# Altium PCB L4Duino_ver1.PcbDoc
Units mm, origin at the board's own origin, x right, y up, seen from the top; angles counter-clockwise.
Board outline 68.58 x 53.34 mm, 4 copper layers (Top Layer, Int1 (GND), Int2 (PWR), Bottom Layer), stack 1.369 mm thick; 6 components, 0 nets, 47 pads, 2 vias.
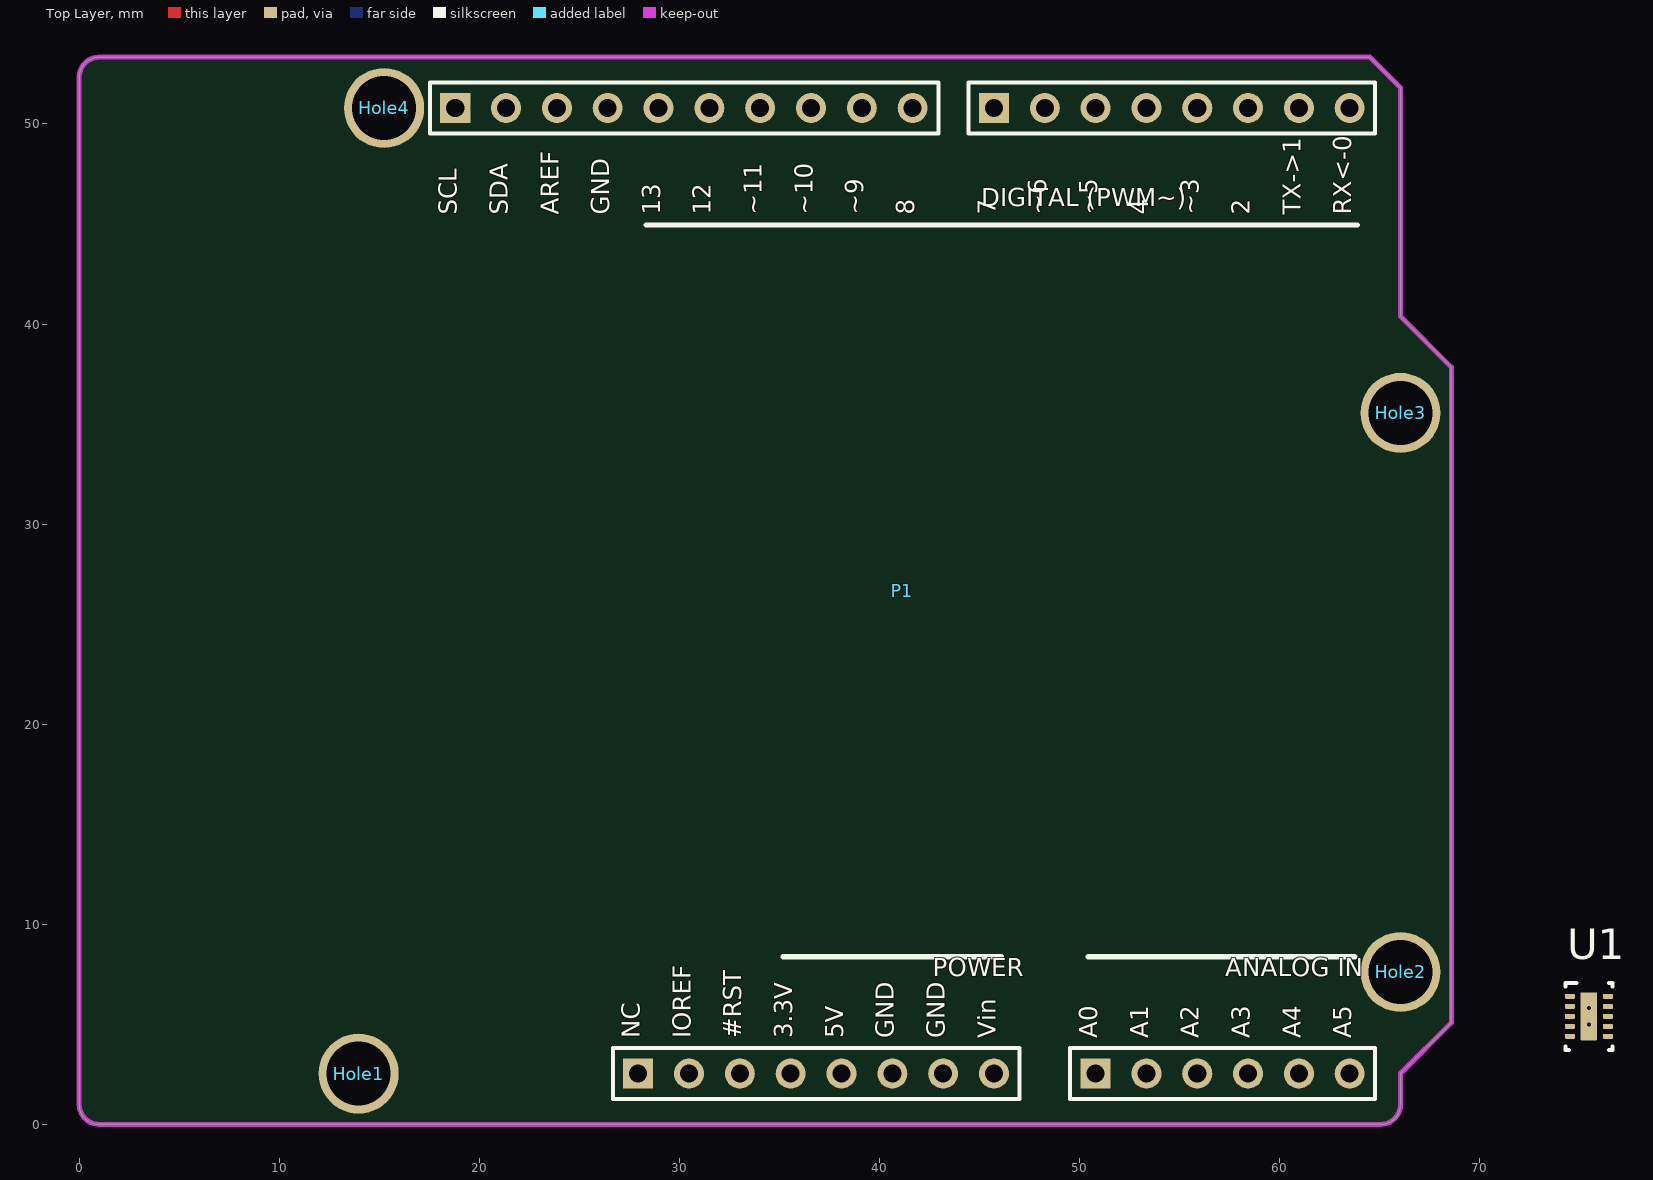
[diagram p0: Top Layer view]
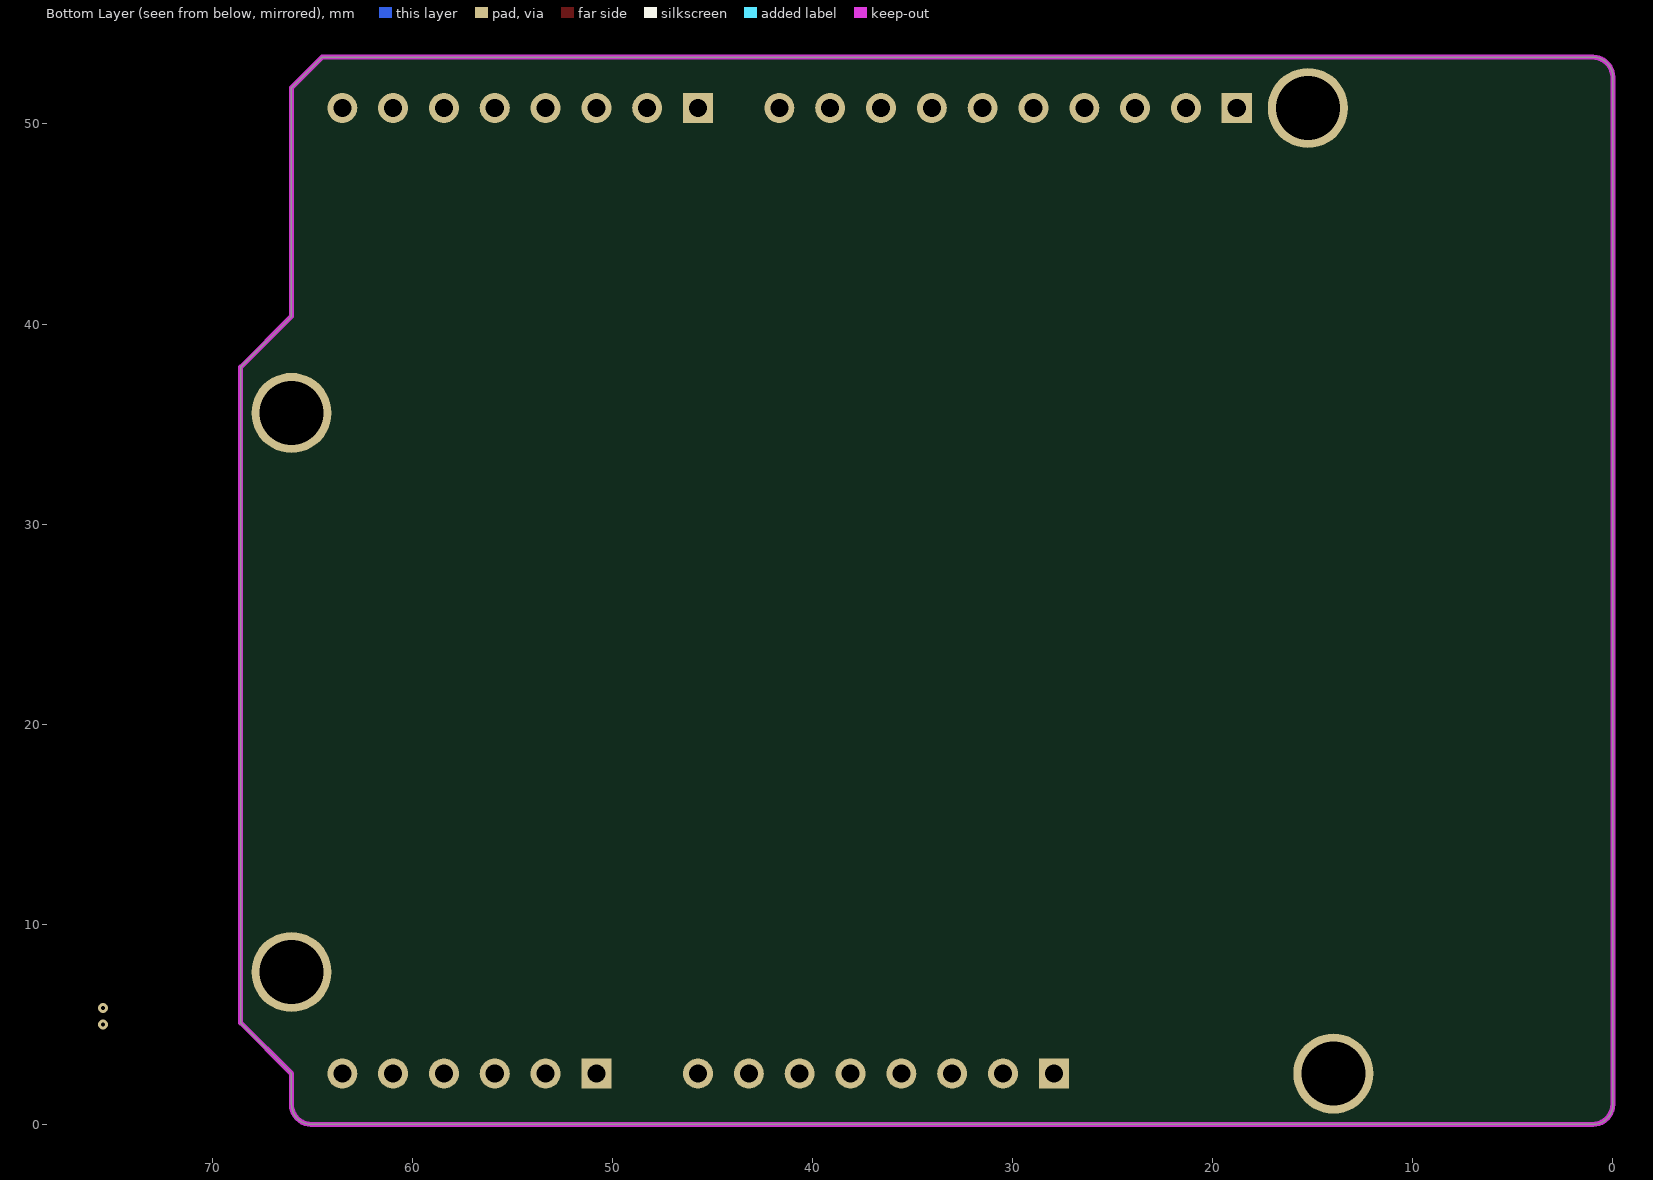
[diagram p1: Bottom Layer view, seen from below]
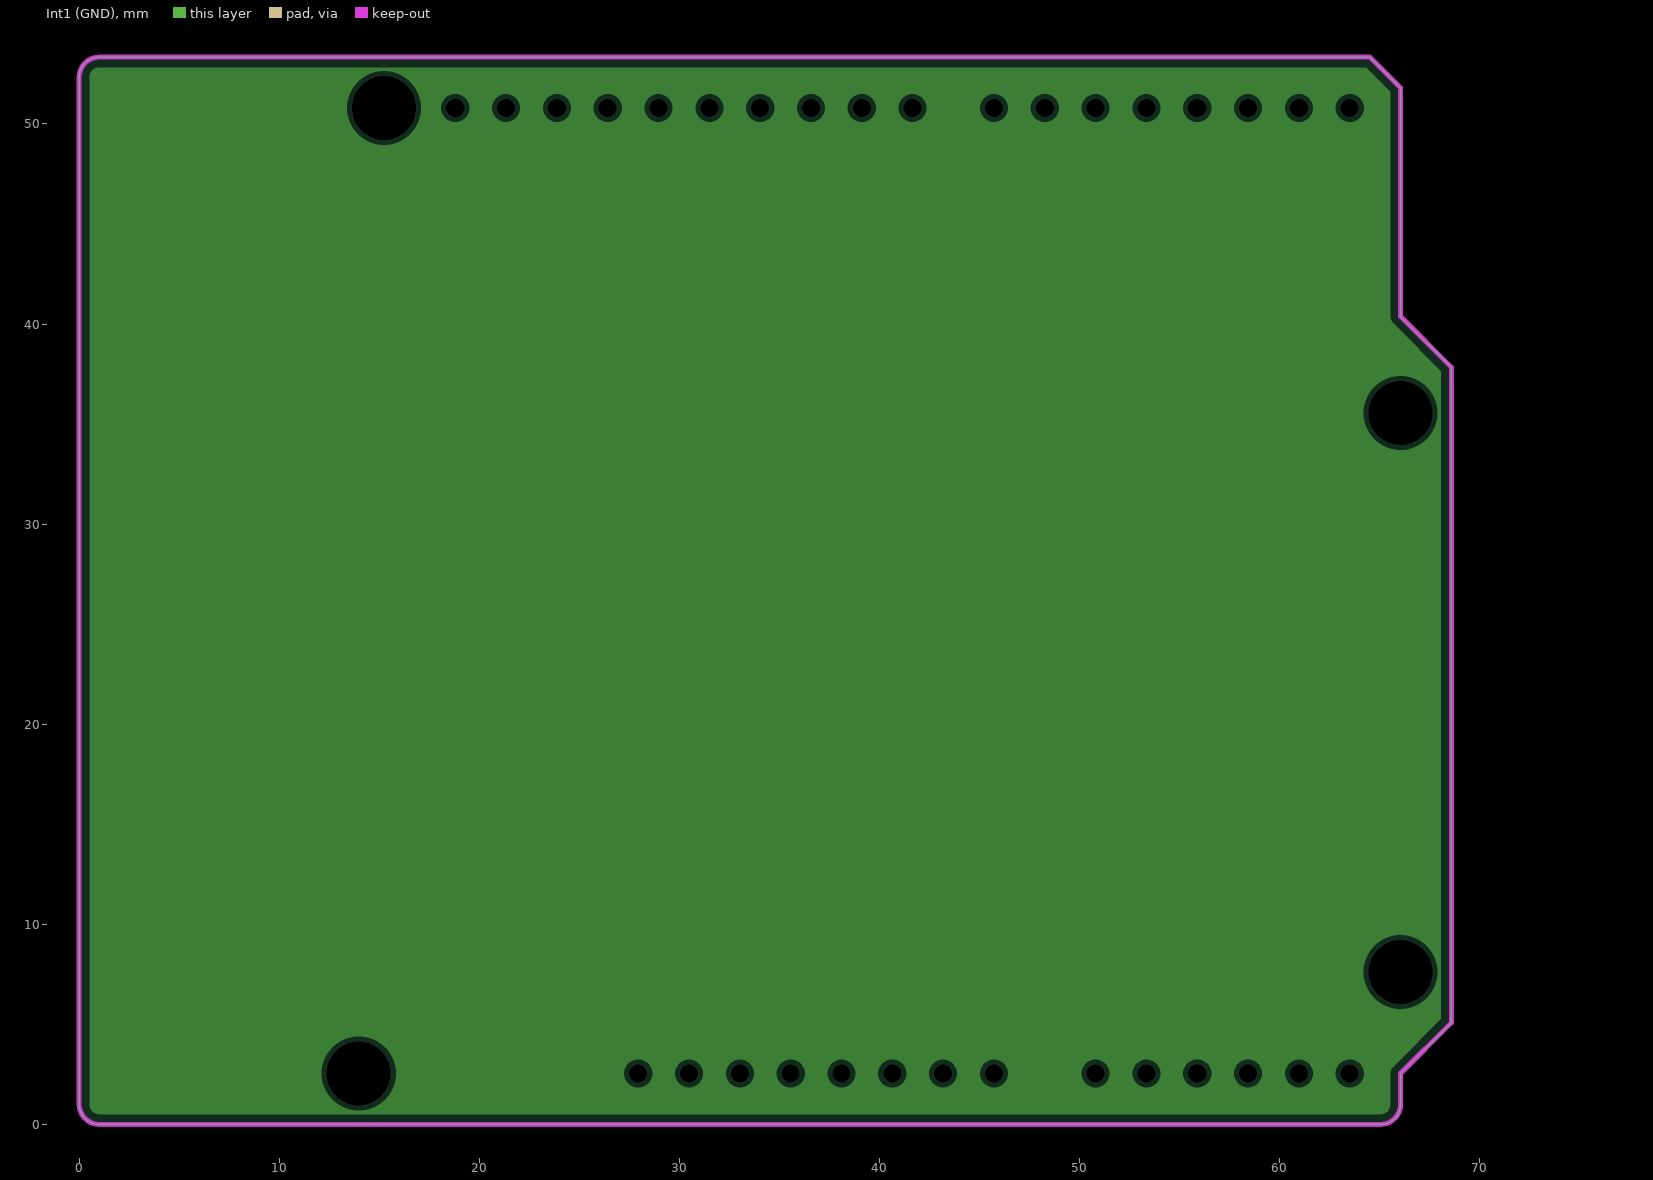
[diagram p2: Int1 (GND), clearances drawn from the general rule]
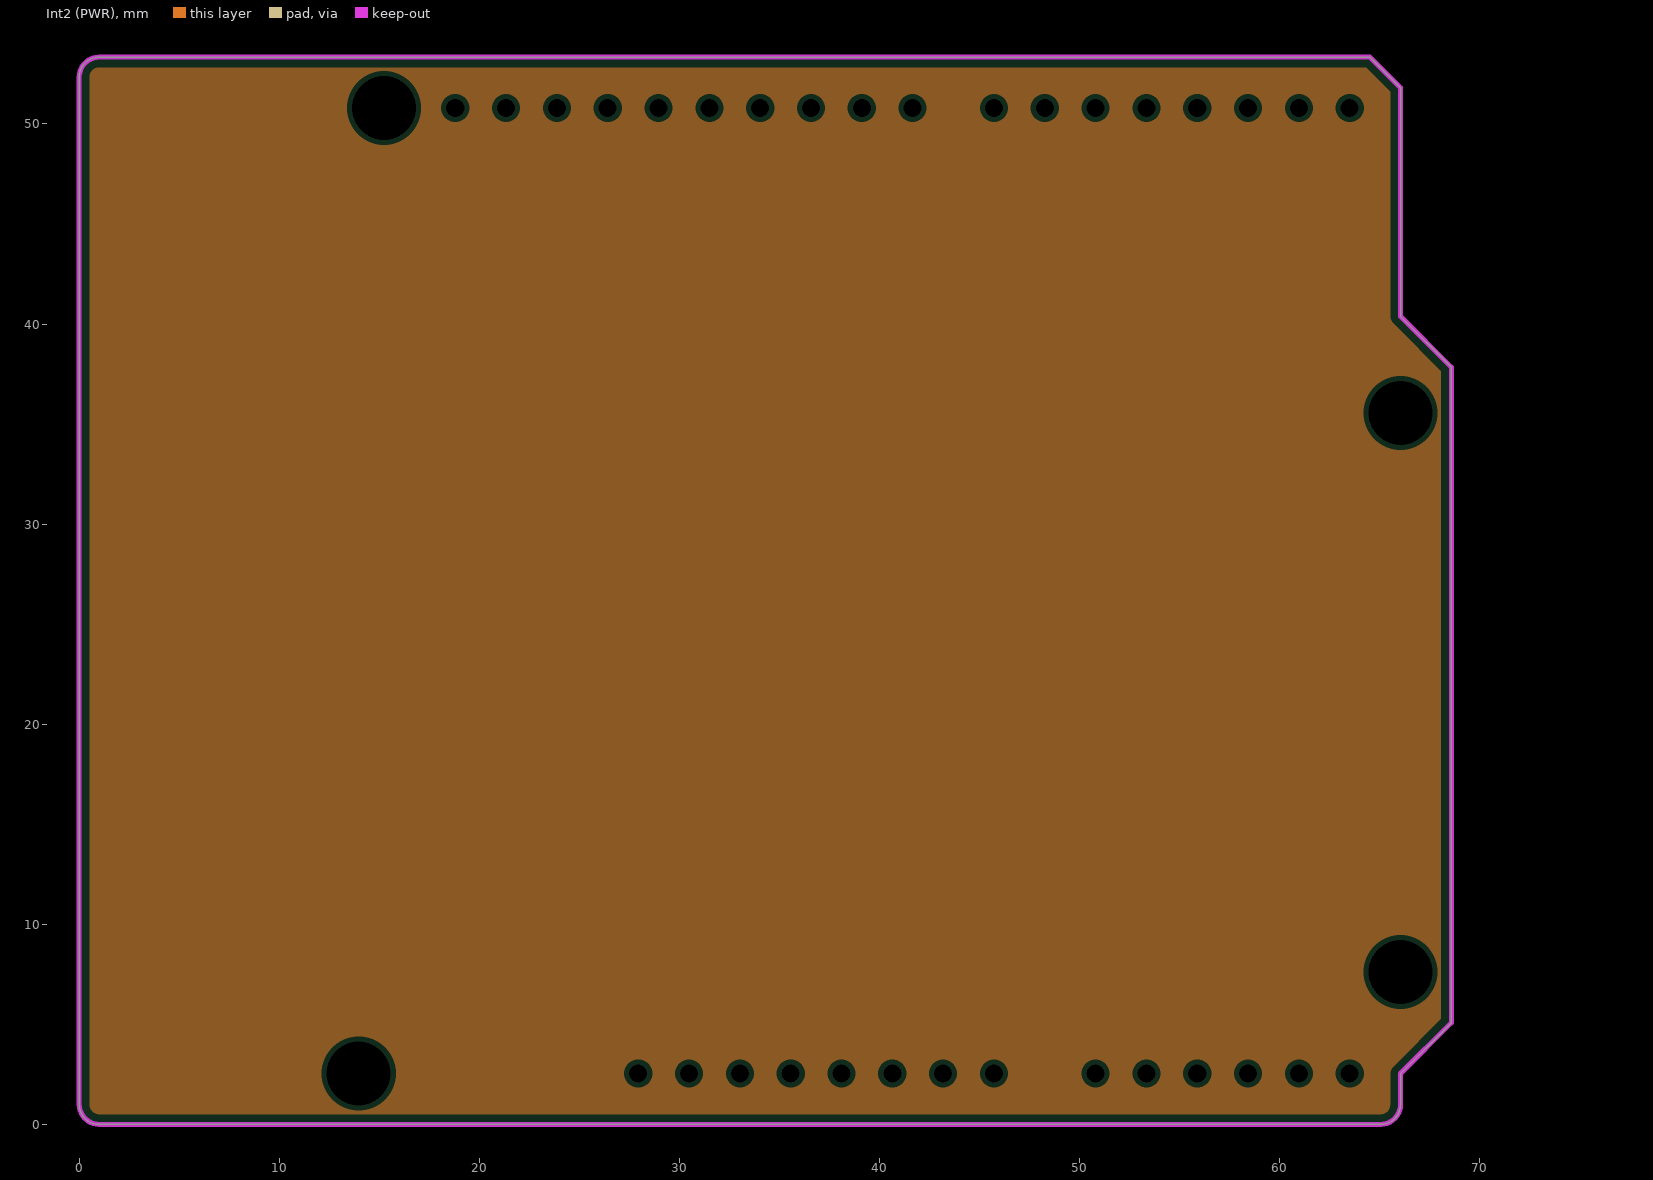
[diagram p3: Int2 (PWR), clearances drawn from the general rule]

## Layer stack, top to bottom
Top Solder: solder mask 0.0254, SM-001, Dk 4
Top Layer: signal copper 0.035
Dielectric 1: prepreg 0.1295, PP-017, Dk 4.3
Dielectric 2: prepreg 0.1295, PP-017, Dk 4.3
Int1 (GND): plane copper 0.035
Dielectric 3: core 0.7112, Core-039, Dk 4.8
Int2 (PWR): plane copper 0.035
Dielectric 4: prepreg 0.1295, PP-017, Dk 4.3
Dielectric 5: prepreg 0.1295, PP-017, Dk 4.3
Bottom Layer: signal copper 0.035
Bottom Solder: solder mask 0.0254, SM-001, Dk 4

## Board outline
0,1 0,52.34 cw(c1,52.34) 1,53.34 64.516,53.34 66.04,51.816 66.04,40.386 68.58,37.846 68.58,5.08 66.04,2.54 66.04,1 cw(c65.04,1) 65.04,0 1,0 cw(c1,1)

## Design rules (kind name [scope] priority, off if disabled: settings)
Clearance "Stitching GNDA" [IsStitchingVia and InNet('GNDA') vs (IsVia and (Not IsStitchingVia)) Or IsPad] p1: gap=0.127 ignorepadtopadclearanceinfootprint=FALSE except(0: Arc-Hole Track-Hole SMDPad-Hole THPad-Hole Via-Hole Fill-Hole Poly-Hole Region-Hole Text-Hole)
Clearance ShieldClearance_BOT [InNamedPolygon('GND_BOT') vs InNet('SHIELD')] p2: gap=0.762 ignorepadtopadclearanceinfootprint=FALSE except(0: Arc-Hole Track-Hole SMDPad-Hole THPad-Hole Via-Hole Fill-Hole Poly-Hole Region-Hole Text-Hole)
Clearance ANTClearance_TOP [InNamedPolygon('GND_TOP') vs InNetClass('50R')] p3: gap=0.35 ignorepadtopadclearanceinfootprint=FALSE
Clearance [All] p4: gap=0.178 ignorepadtopadclearanceinfootprint=TRUE except(0.254: Arc-Fill Arc-Poly Arc-Region Track-Fill Track-Poly Track-Region SMDPad-Fill SMDPad-Poly SMDPad-Region THPad-Fill THPad-Poly THPad-Region Via-Fill Via-Poly Via-Region Fill-Fill Fill-Poly Fill-Region Poly-Poly Poly-Region Region-Region)
DiffPairsRouting DIFF_USB [InDifferentialPair('USB')] p1: maxlimit=0.45 minlimit=0.178 mostfreqgap=0.178 toplayer_minwidth=0.254 toplayer_maxwidth=0.4 toplayer_prefwidth=0.33 bottomlayer_minwidth=0.254 bottomlayer_maxwidth=0.4 bottomlayer_prefwidth=0.33 maxuncoupledlength=12.7
Height [All] p1: minheight=0 maxheight=30.48 prefheight=12.7
HoleSize [All] p1: absolutevalues=TRUE maxlimit=5.08 minlimit=0.025 maxpercent=80.000 minpercent=20.000
MatchedLengths DiffPair_100_2MatchedLengths [InNetClass('DIFF100_A')] p1: tolerance=25.4 checknetsindiffpair=TRUE checkdiffpairvsdiffpair=FALSE checkxsignals=FALSE checkothers=FALSE
MatchedLengths DiffPair_100MatchedLengths [InNetClass('DIFF100_B')] p2: tolerance=0.127 checknetsindiffpair=TRUE checkdiffpairvsdiffpair=FALSE checkxsignals=FALSE checkothers=FALSE
MinimumSolderMaskSliver [All] p1: minsoldermaskwidth=0.025
PasteMaskExpansion [InNet('230V_N')] p1: expansion=0.508
PlaneClearance [All] p1: clearance=0.254
PlaneConnect Via_Thermal_Relief [IsStitchingVia Or IsVia] p1: planeconnectstyle=Direct reliefexpansion=0.508 reliefentries=4 reliefconductorwidth=0.254 reliefairgap=1.016
PlaneConnect ShieldConnect [InNet('SHIELD')] p2: planeconnectstyle=Relief reliefexpansion=0.508 reliefentries=4 reliefconductorwidth=0.254 reliefairgap=1.016
PlaneConnect [All] p3: planeconnectstyle=Relief reliefexpansion=0.203 reliefentries=4 reliefconductorwidth=0.203 reliefairgap=0.127
PolygonConnect GNDA_VIA_CONN [InNet('GND') And (IsStitchingVia Or IsVia)] p1: connectstyle=Direct reliefconductorwidth=0.254 reliefentries=4 polygonreliefangle="90 Angle" airgapwidth=0.254
PolygonConnect [All] p2: connectstyle=Relief reliefconductorwidth=0.254 reliefentries=4 polygonreliefangle="90 Angle" airgapwidth=0.254
RoutingVias [All] p1: holewidth=0.15 width=0.3 viastyle="Through Hole" minholewidth=0.15 minwidth=0.3 maxholewidth=12.7 maxwidth=25.4
SilkToSilkClearance [All] p1: silktosilkclearance=0.127
SilkToSolderMaskClearance SilkscreenOverComponentPads [IsPad] p1: minsilkscreentomaskgap=0.025 clearancetoexposedcopper=TRUE
SolderMaskExpansion [InNet('230V_N')] p1: expansion=0.127
Width ANT [InNetClass('50R')] p1: maxlimit=0.595 minlimit=0.595 preferedwidth=0.595
Width GND [InNet('GND')] p2: maxlimit=2.54 minlimit=0.203 preferedwidth=1.27
Width 3V3 [InNet('3V3')] p3: maxlimit=1.016 minlimit=0.203 preferedwidth=0.762
Width 5V [InNet('5V')] p4: maxlimit=2.286 minlimit=0.254 preferedwidth=1.524
Width 24V [InNet('24V')] p5: maxlimit=2.032 minlimit=0.254 preferedwidth=1.524
Width [All] p6: maxlimit=2.54 minlimit=0.152 preferedwidth=0.203
21 further rules are at their usual default settings.

## Classes and differential pairs
component class top: Hole1 Hole2 Hole3 Hole4

## Components (designator, comment, footprint, x,y, rotation, side; value= is the part's Value field where it differs from the comment)
Hole1 "Hole" Hole-4/3.2 13.97,2.54 r90 top locked
Hole2 "Hole" Hole-4/3.2 66.04,7.62 r90 top
Hole3 "Hole" Hole-4/3.2 66.04,35.56 r90 top locked
Hole4 "Hole" Hole-4/3.2 15.24,50.8 r90 top locked
P1 "NUCLEO-CAPE" ARDUINO_UNO_HEADER_NOSPI 18.796,50.8 r0 top locked
U1 "TPS62177" WSON10 75.45,5.4 r0 top

## Footprints (in the part's own frame and the unit in brackets; to place one, negate y for a bottom-side part, rotate by r counter-clockwise, add the part's x,y. Pads: shape width x height; smd on the part's side, far side on the other; paste and mask are expansions set on the pad)
ARDUINO_UNO_HEADER_NOSPI [mm] "ARDUINO_UNO_HEADER"
  rect 1.5x1.5 hole 0.9: 1(0,0) 11(26.924,0) 19(9.144,-48.26) 27(32.004,-48.26)
  round 1.5 hole 0.9: 2(2.54,0) 3(5.08,0) 4(7.62,0) 5(10.16,0) 6(12.7,0) 7(15.24,0) 8(17.78,0) 9(20.32,0) 10(22.86,0) 12(29.464,0) 13(32.004,0) 14(34.544,0) 15(37.084,0) 16(39.624,0) 17(42.164,0) 18(44.704,0) 20(11.684,-48.26) 21(14.224,-48.26) 22(16.764,-48.26) 23(19.304,-48.26) 24(21.844,-48.26) 25(24.384,-48.26) 26(26.924,-48.26) 28(34.544,-48.26) 29(37.084,-48.26) 30(39.624,-48.26) 31(42.164,-48.26) 32(44.704,-48.26)
  Keep-Out Layer lines w0.254: -18.796,-49.784 ccw(c-17.78,-49.784) -17.78,-50.8 46.253,-50.8 ccw(c46.241,-49.797) 47.244,-49.784 47.244,-48.26 49.784,-45.72 49.784,-12.954 47.244,-10.414 47.244,1.016 45.72,2.54 -17.78,2.54 ccw(c-17.793,1.537) -18.796,1.549 -18.796,-49.784
  silkscreen extent -1.27,-49.53 45.97,1.27, body extent -1.27,-49.53 45.97,1.27, height 6.02
Hole-4/3.2 [mm]
  round 4 hole 3.2: 1(0,0)
WSON10 [mm]
  rrect40% 0.5x0.25 smd: 1(-0.95,1) 2(-0.95,0.5) 3(-0.95,0) 4(-0.95,-0.5) 5(-0.95,-1) 6(0.95,-1) 7(0.95,-0.5) 8(0.95,0) 9(0.95,0.5) 10(0.95,1)
  rrect12% 0.84x2.4 smd paste-0.42: 11(0,0)
  silkscreen extent -1.17,-1.68 1.17,1.67, body extent -1,-1.5 1,1.5, height 0.73

## Part data
Hole1 Hole2 Hole3 Hole4: library part HOLE_
P1: library part Nucleo-headers, "Arduino header"
U1: library part TPS6217x, "TPS6217x 28-V, 0.5-A Step-Down Converter With Sleep Mode", manid=TPS62177

## Via types
v1: diameter 0.5, hole 0.2, Top Layer to Bottom Layer, 2 vias

## Nets (pads, with @x,y where several pads share a name; then routed paths per layer and width w, separated by ;. In a path a pad name is that pad's centre, name@x,y a point inside that pad or via, vN(x,y) a via of type N, cw(c..) or ccw(c..) an arc to the next point about the centre after c; other vN are vias at no path point)
pads on no net: Hole1.1 Hole2.1 Hole3.1 Hole4.1 P1.1 P1.2 P1.3 P1.4 P1.5 P1.6 P1.7 P1.8 P1.9 P1.10 P1.11 P1.12 P1.13 P1.14 P1.15 P1.16 P1.17 P1.18 P1.19 P1.20 P1.21 P1.22 P1.23 P1.24 P1.25 P1.26 P1.27 P1.28 P1.29 P1.30 P1.31 P1.32 U1.1 U1.2 U1.3 U1.4 U1.5 U1.6 U1.7 U1.8 U1.9 U1.10 U1.11
copper on no net:
  other v1: 75.45,4.984 75.45,5.816

## Polygon pours and split planes (outlines as drawn)
no net on Int1 (GND) (split plane): 1,52.83 64.305,52.83 65.53,51.605 65.53,40.386 65.539,40.286 65.568,40.191 65.616,40.102 65.679,40.025 68.07,37.635 68.07,5.291 65.679,2.901 65.616,2.824 65.568,2.735 65.539,2.64 65.53,2.54 65.53,1 65.531,0.988 65.522,0.904 65.494,0.812 65.449,0.727 65.388,0.652 65.313,0.591 65.228,0.546 65.136,0.518 65.052,0.509 65.04,0.51 1,0.51 0.988,0.509 0.904,0.518 0.812,0.546 0.727,0.591 0.652,0.652 0.591,0.727 0.546,0.812 0.518,0.904 0.509,0.988 0.51,1 0.51,52.34 0.509,52.352 0.518,52.436 0.546,52.528 0.591,52.613 0.652,52.688 0.727,52.749 0.812,52.794 0.904,52.822 0.988,52.831
no net on Int2 (PWR) (split plane): 1,52.83 64.305,52.83 65.53,51.605 65.53,40.386 65.539,40.286 65.568,40.191 65.616,40.102 65.679,40.025 68.07,37.635 68.07,5.291 65.679,2.901 65.616,2.824 65.568,2.735 65.539,2.64 65.53,2.54 65.53,1 65.531,0.988 65.522,0.904 65.494,0.812 65.449,0.727 65.388,0.652 65.313,0.591 65.228,0.546 65.136,0.518 65.052,0.509 65.04,0.51 1,0.51 0.988,0.509 0.904,0.518 0.812,0.546 0.727,0.591 0.652,0.652 0.591,0.727 0.546,0.812 0.518,0.904 0.509,0.988 0.51,1 0.51,52.34 0.509,52.352 0.518,52.436 0.546,52.528 0.591,52.613 0.652,52.688 0.727,52.749 0.812,52.794 0.904,52.822 0.988,52.831

## Keep-outs
Keep-Out Layer:
  the board outline again, w0.254

## Dimensions
1,0 to 1,53.34 on Mechanical 1
0,1 to 68.58,5.08 on Mechanical 1

## Text inside footprints (layer, text, board x,y; h text height)
P1: Top Overlay "RX<-0" at 63.881,45.466 h1.52 r90; Top Overlay "TX->1" at 61.341,45.466 h1.52 r90; Top Overlay "~3" at 56.261,45.466 h1.52 r90; Top Overlay "2" at 58.801,45.466 h1.52 r90; Top Overlay "~6" at 48.641,45.466 h1.52 r90; Top Overlay "7" at 46.101,45.466 h1.52 r90; Top Overlay "~5" at 51.181,45.466 h1.52 r90; Top Overlay "4" at 53.721,45.466 h1.52 r90; Top Overlay "12" at 31.877,45.466 h1.52 r90; Top Overlay "13" at 29.337,45.466 h1.52 r90; Top Overlay "AREF" at 24.257,45.466 h1.52 r90; Top Overlay "GND" at 26.797,45.466 h1.52 r90; Top Overlay "~10" at 36.957,45.466 h1.52 r90; Top Overlay "~11" at 34.417,45.466 h1.52 r90; Top Overlay "~9" at 39.497,45.466 h1.52 r90; Top Overlay "8" at 42.037,45.466 h1.52 r90; Top Overlay "SDA" at 21.717,45.466 h1.52 r90; Top Overlay "SCL" at 19.177,45.466 h1.52 r90; Top Overlay "3.3V" at 35.941,4.318 h1.52 r90; Top Overlay "#RST" at 33.401,4.318 h1.52 r90; Top Overlay "NC" at 28.321,4.318 h1.52 r90; Top Overlay "IOREF" at 30.861,4.318 h1.52 r90; Top Overlay "GND" at 41.021,4.318 h1.52 r90; Top Overlay "5V" at 38.481,4.318 h1.52 r90; Top Overlay "GND" at 43.561,4.318 h1.52 r90; Top Overlay "Vin" at 46.101,4.318 h1.52 r90; Top Overlay "A5" at 63.881,4.318 h1.52 r90; Top Overlay "A4" at 61.341,4.318 h1.52 r90; Top Overlay "A2" at 56.261,4.318 h1.52 r90; Top Overlay "A3" at 58.801,4.318 h1.52 r90; Top Overlay "A0" at 51.181,4.318 h1.52 r90; Top Overlay "A1" at 53.721,4.318 h1.52 r90; Top Overlay "DIGITAL (PWM~)" at 45.085,45.593 h1.52; Top Overlay "ANALOG IN" at 57.277,7.112 h1.52; Top Overlay "POWER" at 42.672,7.112 h1.52